# Altium PCB eBox_3G_SIM5320.PcbDoc
Units mm, origin at the board's own origin, x right, y up, seen from the top; angles counter-clockwise.
Board outline 46 x 42 mm, 2 copper layers (Top Layer, Bottom Layer), stack 1.271 mm thick; 63 components, 41 nets, 236 pads, 97 vias.
Unrouted connection lines stored in the file: 1.
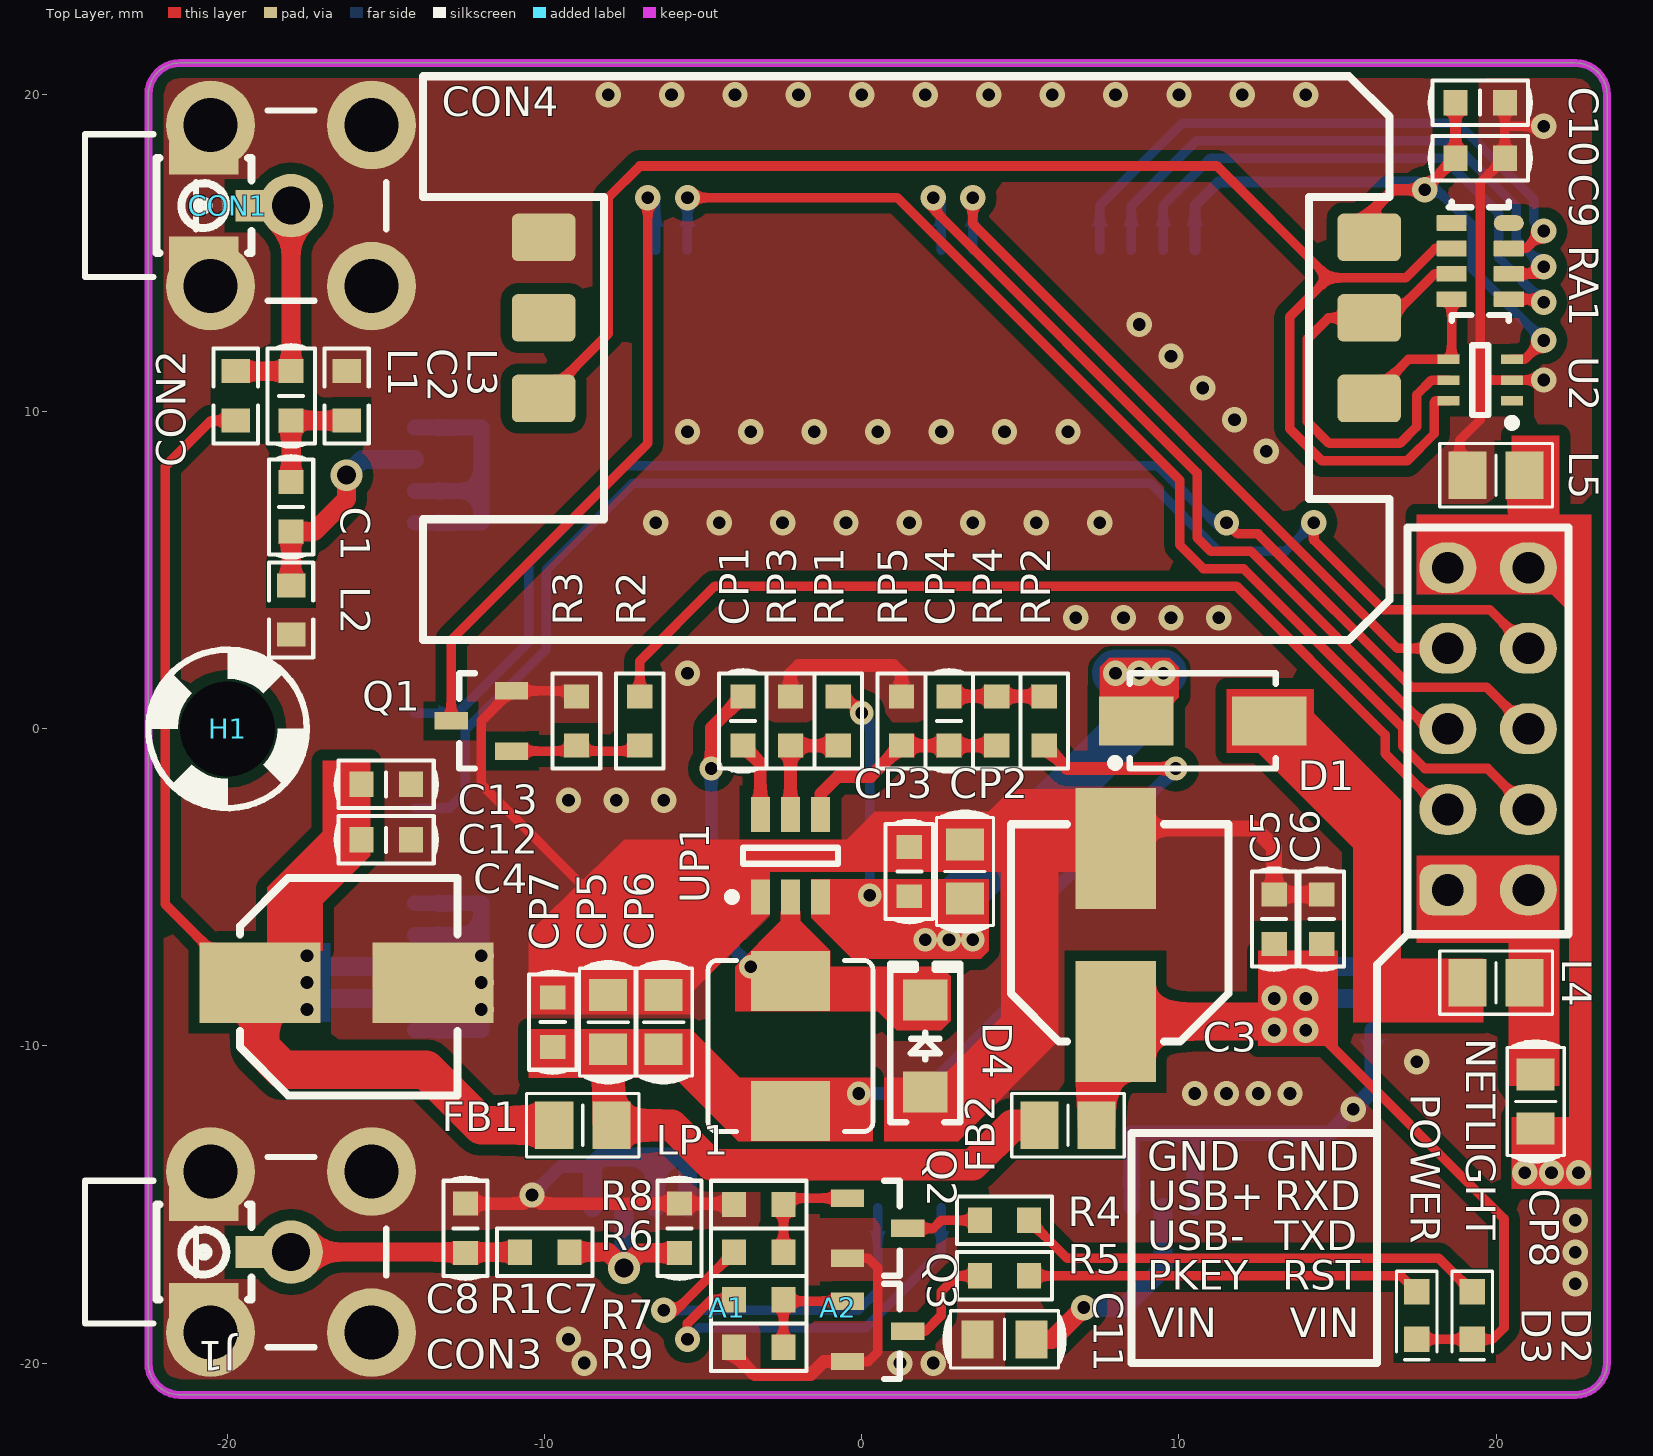
[diagram p0: Top Layer view]
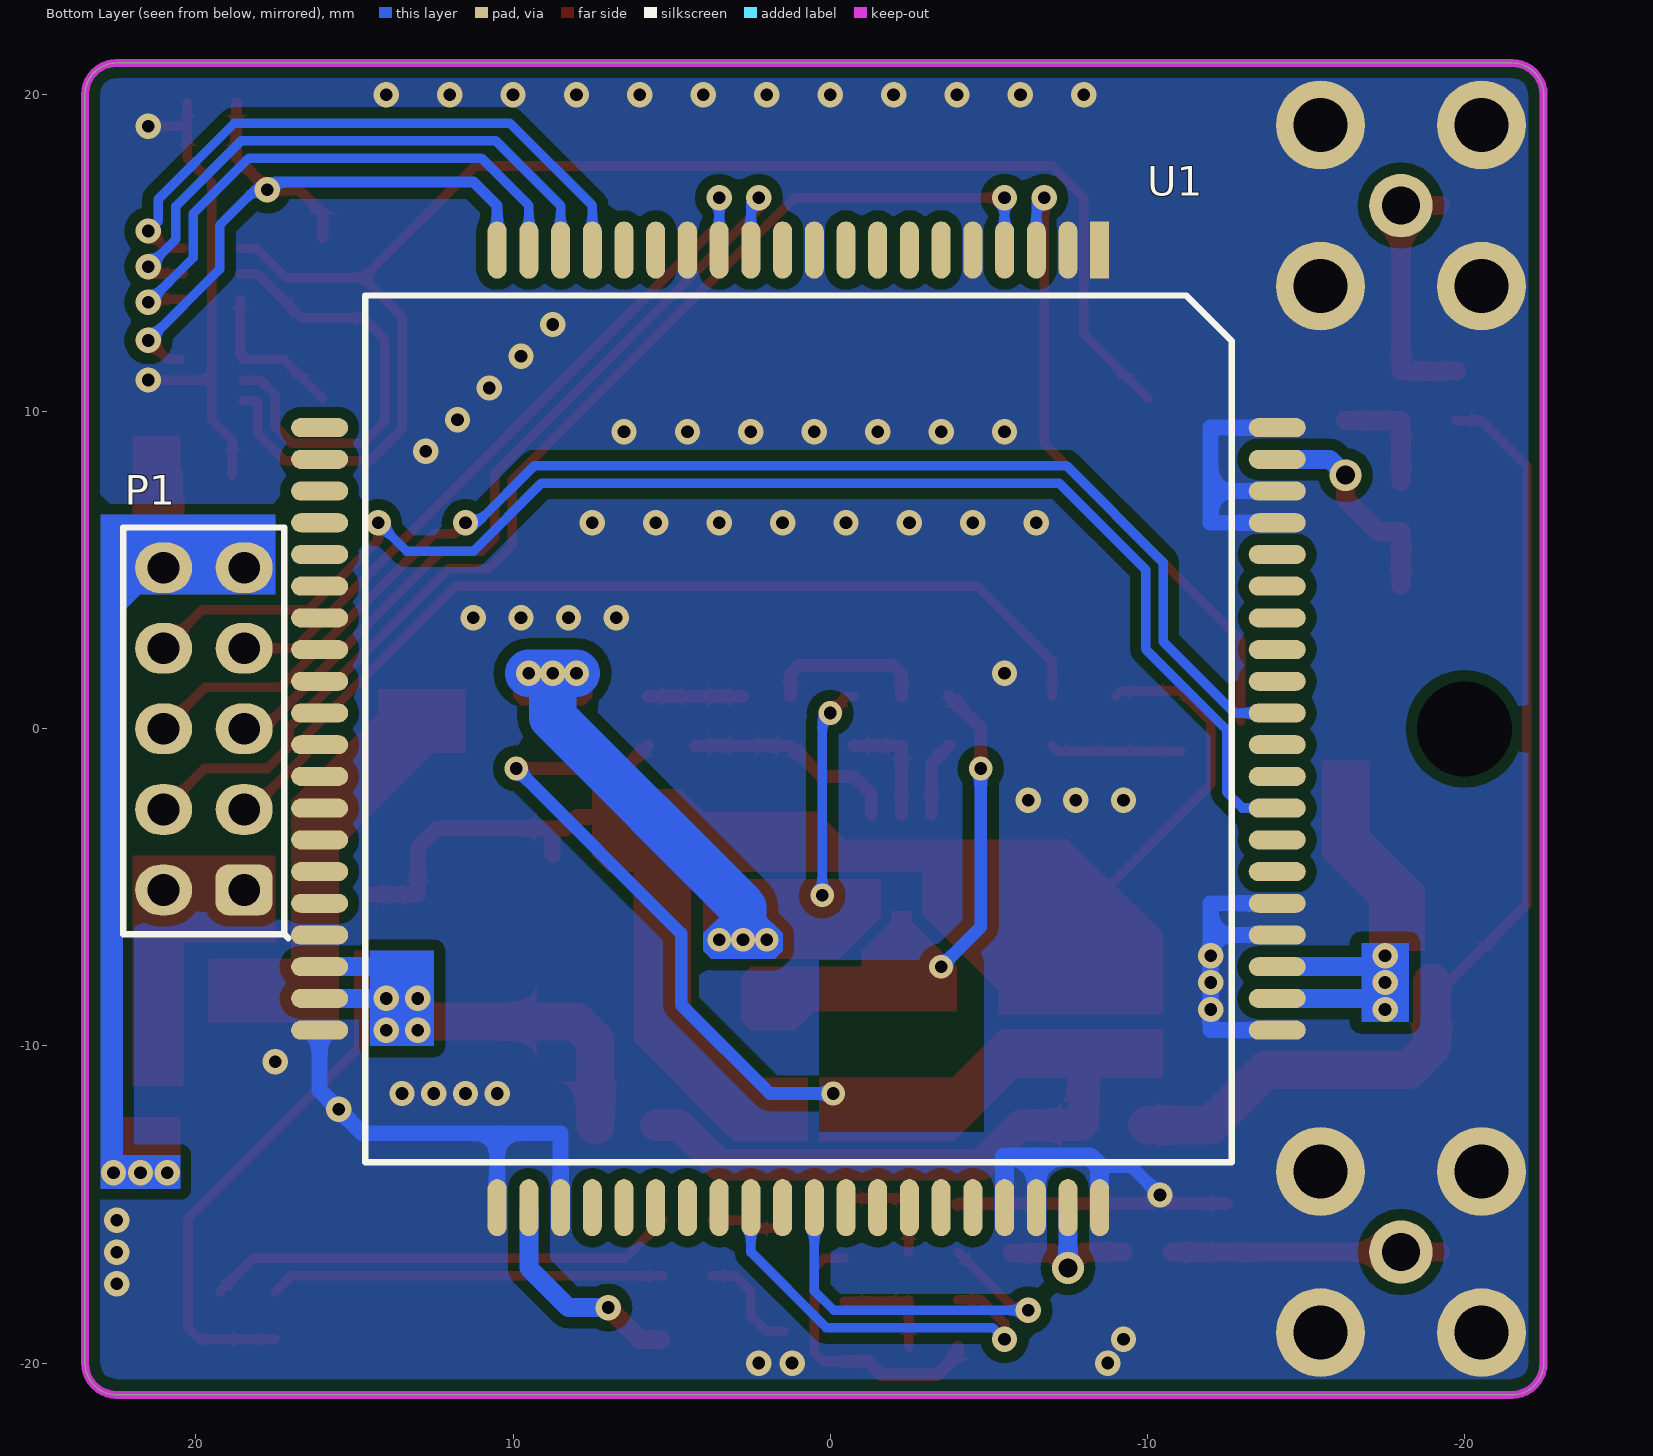
[diagram p1: Bottom Layer view, seen from below]

## Layer stack, top to bottom
Top Solder: solder mask 0.0102, Solder Resist, Dk 3.5
Top Layer: signal copper 0.0356
Dielectric 1: dielectric 1.2, FR-4, Dk 4.8
Bottom Layer: signal copper 0.0356
Bottom Solder: solder mask 0.0102, Solder Resist, Dk 3.5

## Board outline
-22.5,-20 ccw(c-21.5,-20) -21.5,-21 22.5,-21 ccw(c22.5,-20) 23.5,-20 23.5,20 ccw(c22.5,20) 22.5,21 -21.5,21 ccw(c-21.5,20) -22.5,20

## Design rules (kind name [scope] priority, off if disabled: settings)
Clearance Clearance_1 [InPolygon] p1: gap=0.35
Clearance [All] p2: gap=0.25
ComponentClearance ComponentClearance_1 [InComponent('F1') or InComponent('A1') or InComponent('A2') or InComponent('TX1')] p1: gap=0 collisioncheckmode=3 verticalgap=0 showdistances=FALSE
ComponentClearance [All] p2: gap=0.254 collisioncheckmode=3 verticalgap=0.254 showdistances=FALSE
PolygonConnect PolygonConnect_2 [InNet('GND')] p1: connectstyle=Direct reliefconductorwidth=0.254 reliefentries=4 polygonreliefangle="90 Angle" airgapwidth=0.254
PolygonConnect PolygonConnect_1 [IsVia] p2: connectstyle=Direct reliefconductorwidth=0.254 reliefentries=4 polygonreliefangle="90 Angle" airgapwidth=0.254
PolygonConnect [All] p3: connectstyle=Relief reliefconductorwidth=0.381 reliefentries=4 polygonreliefangle="90 Angle" airgapwidth=0.635
RoutingVias [All] p1: holewidth=0.4 width=0.8 viastyle="Through Hole" minholewidth=0.3 minwidth=0.6 maxholewidth=5 maxwidth=10
SolderMaskExpansion [All] p1: expansion=0.102
Width [All] p1: maxlimit=50 minlimit=0.2 preferedwidth=0.25
29 further rules are at their usual default settings.

## Classes and differential pairs
component class eBox_3G_REG: CP1 CP2 CP3 CP4 CP5 CP6 CP7 CP8 D1 D4 FB1 FB2 H1 L4 L5 LP1 P1 RP1 RP2 RP3 RP4 RP5 UP1
component class eBox_3G_SIM: A1 A2 C1 C2 C3 C4 C5 C6 C7 C8 C9 C10 C11 C12 C13 CON1 CON2 CON3 CON4 D2 D3 J1 L1 L2 L3 Q1 Q2 Q3 R1 R2 R3 R4 R5 R6 R7 R8 R9 RA1 U1 U2

## Components (designator, comment, footprint, x,y, rotation, side; value= is the part's Value field where it differs from the comment)
A1 "GSM Antenna" Antenna -4.25,-18.25 r0 top
A2 "GPS Antenna" Antenna -0.75,-18.25 r0 top
C1 "33pF" "CC 0603" -18,7 r270 top
C2 "33pF" "CC 0603" -18,10.5 r270 top
C3 "220uF" "C SMD ALU (D8)" 8,-6.5 r90 top
C4 "220uF" "C SMD ALU (D8)" -16.25,-8 r0 top
C5 "33pF" "CC 0603" 13,-6 r270 top
C6 "10pF" "CC 0603" 14.5,-6 r270 top
C7 "N/A" "CC 0603" -5.75,-15.75 r270 top
C8 "N/A" "CC 0603" -12.5,-15.75 r270 top
C9 "33pF" "CC 0603" 19.5,18 r0 top
C10 "0.1uF" "CC 0603" 19.5,19.75 r0 top
C11 "10uF" "CC 0805" 4.5,-19.25 r0 top
C12 "33pF" "CC 0603" -15,-3.5 r180 top
C13 "10pF" "CC 0603" -15,-1.75 r180 top
CON1 "IPX" CONN/IPX/SMD -20.75,16.5 r0 top locked
CON2 "SMA" CONN/SMA/RA -18,16.5 r0 top locked
CON3 "SMA" CONN/SMA/RA -18,-16.5 r0 top locked
CON4 "SIM Holder" "CON SIM Holder C707" 16,15.5 r180 top locked
CP1 "0.1uF" "CC 0603" -3.75,0.25 r90 top
CP2 "10uF" "CC 0805" 3.25,-4.5 r90 top
CP3 "0.1uF" "CC 0603" 1.5,-4.5 r90 top
CP4 "75pF" "CC 0603" 2.75,0.25 r270 top
CP5 "22uF" "CC 0805" -8,-9.25 r90 top
CP6 "22uF" "CC 0805" -6.25,-9.25 r90 top
CP7 "0.1uF" "CC 0603" -9.75,-9.25 r90 top
CP8 "1uF" "CC 0805" 21.25,-11.75 r270 top
D1 "Diode" "DO-214AC (SMA) L" 10.75,0.25 r180 top
D2 "LED GREEN" "Led 0603 - green" 19.25,-18.5 r90 top
D3 "LED RED" "LED 0603 - RED" 17.5,-18.5 r90 top
D4 "VTVS58ASMF-HM3-08" "SMF DO-219AB" 2,-10 r90 top
FB1 "270 Ohms @ 100MHz" "L 0805 (2012)" -8.8,-12.5 r180 top
FB2 "270 Ohms @ 100MHz" "L 0805 (2012)" 6.5,-12.5 r0 top
H1 "Screw Hole" SCREW/2.8M/5M -20,0 r0 top
J1 "IPEX" CONN/IPX/SMD -20.75,-16.5 r0 top locked
L1 "BEAD" "LL 0603" -19.75,10.5 r270 top
L2 "N/A" "LL 0603" -18,3.75 r90 top
L3 "N/A" "LL 0603" -16.25,10.5 r270 top
L4 "FB" "L 0805 (2012)" 20,-8 r180 top
L5 "FB" "L 0805 (2012)" 20,8 r180 top
LP1 "10uH" IND_MWSA0518_525418 -2.25,-10 r270 top
P1 "Header 5X2" HDR/Header/10/DL 19.75,0 r90 bottom
Q1 "MMBT3904LT1G" SOT-23 -12,0.25 r180 top
Q2 "MMBT3904LT1G" SOT-23 0.5,-15.75 r0 top
Q3 "MMBT3904LT1G" SOT-23 0.5,-19 r0 top
R1 "0R" "RR 0603" -10,-16.5 r0 top
R2 "4.7k" "RR 0603" -7,0.25 r270 top
R3 "47k" "RR 0603" -9,0.25 r90 top
R4 "330R" "RR 0603" 4.5,-15.5 r0 top
R5 "330R" "RR 0603" 4.5,-17.25 r0 top
R6 "4.7k" "RR 0603" -3.25,-16.5 r0 top
R7 "4.7k" "RR 0603" -3.25,-18 r0 top
R8 "47k" "RR 0603" -3.25,-15 r180 top
R9 "47k" "RR 0603" -3.25,-19.5 r180 top
RA1 "22R" "RAx4 1206 (3216)" 19.5,14.75 r0 top
RP1 "510k" "RR 0603" -0.75,0.25 r90 top
RP2 "49.9R" "RR 0603" 5.75,0.25 r90 top
RP3 "NC/105k" "RR 0603" -2.25,0.25 r270 top
RP4 "100.0k" "RR 0603" 4.25,0.25 r270 top
RP5 "17.4K" "RR 0603" 1.25,0.25 r90 top
U1 "SIM5320A" SIM5320 1,0 r270 bottom locked
U2 "SMF05CT1G" SOT-363-6 19.5,11 r180 top
UP1 "TPS54302DDC" SOT-23-6 -2.25,-4 r90 top

## Footprints (in the part's own frame and the unit in brackets; to place one, negate y for a bottom-side part, rotate by r counter-clockwise, add the part's x,y. Pads: shape width x height; smd on the part's side, far side on the other; paste and mask are expansions set on the pad)
Antenna [mm]
"C SMD ALU (D8)" [mil] "SMD Aluminum Electrolytic Capacitor, size D8 (6.3 x 7.7 mm)"
  rect 150x100 smd: 1(-107.5,0) 2(107.5,0)
  silkscreen extent -132,-140 138,130, body extent -138,-135 138,125, height 303
"CC 0603" [mm] "Chip Capacitor, 2-Leads, Body 1.6x0.8mm, IPC Medium Density"
  rect 0.756x0.8 smd: 1(-0.778,0) 2(0.778,0)
  silkscreen extent -1.6,-0.7 1.6,0.7, body extent -0.8,-0.43 0.8,0.43, height 0.81
"CC 0805" [mm] "Chip Capacitor, 2-Leads, Body 2.0x1.3mm, IPC Medium Density"
  rect 1.006x1.2 smd: 1(-0.853,0) 2(0.853,0)
  silkscreen extent -1.9,-0.9 1.9,0.9, body extent -1,-0.64 1,0.61, height 0.6
"CON SIM Holder C707" [mm] "SIM Holder,  6 pins"
  rrect25% 2x1.5 smd: 1(0,0) 2(0,2.54) 3(0,5.08) 5(26.035,0) 6(26.035,2.54) 7(26.035,5.08)
  silkscreen extent -0.64,-5.08 29.84,12.7, body extent -0.4,-4.85 29.6,12.45, height 2.5
CONN/IPX/SMD [mm]
  rect 1x1 smd: 1(1.5,0)
  rect 2.2x1.05 smd: 2(0,1.5) 3(0,-1.5)
  silkscreen extent -1.5,-1.5 1.5,1.5, body extent -1.3,-1.5 1.55,1.5, height 1.25
CONN/SMA/RA [mm] "Connector; RF Coaxial, MCX, Thru-Hole; 5 Position; Right Angle"
  round 2 hole 1.2: 1(0,0)
  round 2.8 hole 1.7: 2(-2.54,-2.54) 3(2.54,-2.54) 4(2.54,2.54) 5(-2.54,2.54)
  silkscreen extent -6.5,-3 3,3, body extent -6.5,-3 3,3, height 5.9
"DO-214AC (SMA) L" [mm] "Molded Diode, 2-Leads, Body 4.3x2.7mm, IPC Medium Density"
  rect 2.35x1.55 smd: 1(-2.1,0) 2(2.1,0)
  silkscreen extent -2.3,-1.5 2.89,1.5, body extent -2.6,-1.3 2.6,1.3, height 2.4
HDR/Header/10/DL [mm]
  rrect50% 1.6x1.8 hole 1: 1(-5.08,-1.27)
  oval 1.6x1.8 hole 1: 2(-5.08,1.27) 3(-2.54,-1.27) 4(-2.54,1.27) 5(0,-1.27) 6(0,1.27) 7(2.54,-1.27) 8(2.54,1.27) 9(5.08,-1.27) 10(5.08,1.27)
  silkscreen extent -6.6,-2.67 6.35,2.54, body extent -6.35,-2.54 6.35,2.54, height 8.89
IND_MWSA0518_525418 [mm]
  rect 1.9x2.5 smd paste+0 mask+0: 1(-2.05,0) 2(2.05,0)
  Top Layer pour cut-out: -2.7,2.6 2.7,2.6 2.7,-2.6 -2.7,-2.6
  silkscreen extent -2.7,-2.6 2.7,2.6, body extent -2.7,-2.6 2.7,2.6, height 1.8
"L 0805 (2012)" [mm] "Chip Capacitor, 2-Leads, Body 2.0x1.3mm, IPC Medium Density"
  rect 1.2x1.5 smd: 1(-0.9,0) 2(0.9,0)
  silkscreen extent -1.78,-1 1.78,1, body extent -1,-0.6 1,0.6, height 0.95
"Led 0603 - green" [mm] "Led SMD 0603"
  rect 0.8x0.8 smd: 1(-0.75,0) 2(0.75,0)
  silkscreen extent -1.4,-0.64 1.4,0.63, body extent -0.81,-0.4 0.81,0.4, height 0.6
"LED 0603 - RED" [mm] "Led SMD 0603"
  rect 0.8x0.8 smd: 1(-0.75,0) 2(0.75,0)
  silkscreen extent -1.4,-0.64 1.4,0.64, body extent -0.81,-0.4 0.81,0.4, height 0.6
"LL 0603" [mm] "Chip Capacitor, 2-Leads, Body 1.6x0.8mm, IPC Medium Density"
  rect 0.756x0.9 smd: 1(-0.778,0) 2(0.778,0)
  silkscreen extent -1.5,-0.7 1.5,0.7, body extent -0.8,-0.48 0.8,0.47, height 0.8
"RAx4 1206 (3216)" [mm] "Resistor Array x4 1206 (4D03)"
  rrect10% 0.95x0.5 smd: 1(-0.9,1.2) 2(-0.9,0.4) 3(-0.9,-0.4) 4(-0.9,-1.2) 5(0.9,-1.2) 6(0.9,-0.4) 7(0.9,0.4)
  oval 0.95x0.5 smd: 8(0.9,1.2)
  silkscreen extent -0.99,-1.88 0.9,1.88, body extent -0.8,-1.6 0.8,1.6, height 0.5
"RR 0603" [mm] "Chip Resistor, 2-Leads, Body 1.6x0.8mm, IPC Medium Density"
  rect 0.756x0.8 smd: 1(-0.778,0) 2(0.778,0)
  silkscreen extent -1.5,-0.75 1.5,0.75, body extent -0.8,-0.4 0.8,0.4, height 0.5
SCREW/2.8M/5M [mm]
  round 0 hole 3 unplated: 1(0,0)
  silkscreen extent -2.5,-2.5 2.5,2.5
SIM5320 [mm]
  rect 1.8x0.6 smd: 1(-15.1,9.5)
  oval 1.8x0.6 smd: 2(-15.1,8.5) 3(-15.1,7.5) 4(-15.1,6.5) 5(-15.1,5.5) 6(-15.1,4.5) 7(-15.1,3.5) 8(-15.1,2.5) 9(-15.1,1.5) 10(-15.1,0.5) 11(-15.1,-0.5) 12(-15.1,-1.5) 13(-15.1,-2.5) 14(-15.1,-3.5) 15(-15.1,-4.5) 16(-15.1,-5.5) 17(-15.1,-6.5) 18(-15.1,-7.5) 19(-15.1,-8.5) 20(-15.1,-9.5) 41(15.1,-9.5) 42(15.1,-8.5) 43(15.1,-7.5) 44(15.1,-6.5) 45(15.1,-5.5) 46(15.1,-4.5) 47(15.1,-3.5) 48(15.1,-2.5) 49(15.1,-1.5) 50(15.1,-0.5) 51(15.1,0.5) 52(15.1,1.5) 53(15.1,2.5) 54(15.1,3.5) 55(15.1,4.5) 56(15.1,5.5) 57(15.1,6.5) 58(15.1,7.5) 59(15.1,8.5) 60(15.1,9.5)
  oval 0.6x1.8 smd: 21(-9.5,-15.1) 22(-8.5,-15.1) 23(-7.5,-15.1) 24(-6.5,-15.1) 25(-5.5,-15.1) 26(-4.5,-15.1) 27(-3.5,-15.1) 28(-2.5,-15.1) 29(-1.5,-15.1) 30(-0.5,-15.1) 31(0.5,-15.1) 32(1.5,-15.1) 33(2.5,-15.1) 34(3.5,-15.1) 35(4.5,-15.1) 36(5.5,-15.1) 37(6.5,-15.1) 38(7.5,-15.1) 39(8.5,-15.1) 40(9.5,-15.1) 61(9.5,15.1) 62(8.5,15.1) 63(7.5,15.1) 64(6.5,15.1) 65(5.5,15.1) 66(4.5,15.1) 67(3.5,15.1) 68(2.5,15.1) 69(1.5,15.1) 70(0.5,15.1) 71(-0.5,15.1) 72(-1.5,15.1) 73(-2.5,15.1) 74(-3.5,15.1) 75(-4.5,15.1) 76(-5.5,15.1) 77(-6.5,15.1) 78(-7.5,15.1) 79(-8.5,15.1) 80(-9.5,15.1)
  silkscreen extent -13.66,-13.66 13.66,13.67, body extent -15,-15 15,15, height 2.9
"SMF DO-219AB" [mm] "Molded Diode, 2-Leads, Body 3.90x1.90mm, IPC Medium Density"
  rect 1.3x1.4 smd: 1(-1.45,0) 2(1.45,0)
  silkscreen extent -2.4,-1.1 2.59,1.1, body extent -1.5,-0.9 1.5,0.9, height 1.18
SOT-23 [mm] "SOT23, 3-Leads, Body 3.0x2.5mm (max), Pitch 0.95mm, IPC Medium Density"
  rect 1.05x0.55 smd: 1(-0.95,0.95) 2(-0.95,-0.95) 3(0.95,0)
  silkscreen extent 0.2,-1.5 0.7,1.5, body extent -1.28,-1.46 1.27,1.46, height 0.95
SOT-23-6 [mm] "SOT23, 6-Leads, Body 3.0x3.0mm (max), Pitch 0.95mm, IPC Medium Density"
  rect 1.1x0.6 smd: 1(-1.3,0.95) 2(-1.3,0) 3(-1.3,-0.95) 4(1.3,-0.95) 5(1.3,0) 6(1.3,0.95)
  silkscreen extent -1.42,-1.5 0.25,1.97, body extent -1.27,-1.4 1.16,1.4, height 1.09
SOT-363-6 [mm] "SOT363 (SC-88, SC-70-6), 6-Leads, Body 2.2x2.2mm (max), Pitch 0.65mm, IPC Medium Density"
  rect 0.7x0.3 smd: 1(-1,0.65) 2(-1,0) 3(-1,-0.65) 4(1,-0.65) 5(1,0) 6(1,0.65)
  silkscreen extent -1.13,-1.1 0.25,1.47, body extent -1.15,-1.05 1.15,1.05, height 1

## Part data
A1 A2: library part Antenna, "Antenna"
C1 C2 C5 C9 C12: library part "Capacitor NP", "CAP CER 33PF 100V C0G/NP0 0603"
C3 C4: library part Capacitor, "CAP TANT POLY 100UF 6.3V 1210"
C6 C13: library part "Capacitor NP", "CAP CER 10PF 100V C0G/NP0 0603"
C7 C8: library part "Capacitor NP", "CAP N/A"
C10 CP1 CP3 CP7: library part "Capacitor NP", "CAP CER 0.1UF 16V X7R 0603"
C11: library part "Capacitor NP", "CAP CER 10UF 10V X5R 0603"
CON1: library part "CON IPX"
CON2 CON3: library part "CON SMA", "SMA connectors"
CON4: library part "SIM holder 6 pin", "SIM Card holder, 6 pins"
CP2: library part "Capacitor NP", "CAP CER 10UF 25V X5R 0805"
CP4: library part "Capacitor NP", "CAP CER 75PF 50V C0G/NP0 0603"
CP5 CP6 CP8: library part "Capacitor NP", "CAP CER 22UF 25V X5R 0805"
D1: "Default Diode"
D2: library part Led, "LED GREEN DIFFUSED 0603 SMD"
D3: library part Led, "LED RED DIFFUSED 0603 SMD"
D4: "TVS DIODE 57.6V 98V DO219AB"
FB1 FB2: library part BLM21PG300SZ1D, "FERRITE BEAD 30 OHM 0805 1LN"
J1: library part "CON IPX", "CONN UMC RCPT STR 50 OHM SMD"
L1: library part Inductor, "FERRITE BEAD 30 OHM 0603 1LN"
L2 L3: library part Inductor, "IND N/A"
L4 L5: library part Inductor, "Inductor"
LP1: library part "Inductor Power", "Fixed Inductors 10uH 20% Low Profile"
P1: "Header, 5-Pin, Dual row"
Q1 Q2 Q3: "TRANS NPN 40V 0.2A SOT23"
R1: library part Resistors, "RES SMD 0 OHM JUMPER 1/10W 0603"
R2 R6 R7: library part Resistors, "RES SMD 4.7K OHM 1% 1/10W 0603"
R3 R8 R9: library part Resistors, "RES SMD 47K OHM 5% 1/10W 0603"
R4 R5: library part Resistors, "RES SMD 330 OHM 5% 1/10W 0603"
RA1: library part "Resistor Array x4"
RP1: library part Resistors, "RES SMD 510K OHM 1% 1/10W 0603"
RP2: library part Resistors, "RES SMD 49.9 OHM 1% 1/10W 0603"
RP3: library part Resistors, "RES SMD 105K OHM 1% 1/10W 0603"
RP4: library part Resistors, "RES SMD 100K OHM 1% 1/10W 0603"
RP5: library part Resistors, "RES SMD 17.4K OHM 1% 1/10W 0603"
U2: library part SMF05C, "TVS DIODE 5V 12.5V SC88"
UP1: library part TPS56339, "IC REG BUCK ADJ 3A TSOT23-6"

## Via types
v1: diameter 0.8, hole 0.4, Top Layer to Bottom Layer, tented both sides, 86 vias
v2: diameter 0.75, hole 0.4, Top Layer to Bottom Layer, tented both sides, 9 vias
v3: diameter 1, hole 0.6, Top Layer to Bottom Layer, tented both sides, 2 vias

## Nets (pads, with @x,y where several pads share a name; then routed paths per layer and width w, separated by ;. In a path a pad name is that pad's centre, name@x,y a point inside that pad or via, vN(x,y) a via of type N, cw(c..) or ccw(c..) an arc to the next point about the centre after c; other vN are vias at no path point)
GND: C3.2 C4.2 C5.1 C6.1 C7.1 C8.1 C9.2 C10.2 C11.1 C12.1 C13.1 CON1.2 CON1.3 CON2.2 CON2.3 CON2.4 CON2.5 CON3.2 CON3.3 CON3.4 CON3.5 CON4.5 CP2.2 CP3.2 CP5.2 CP6.2 CP7.2 D4.1 J1.2 J1.3 L2.1 L3.1 L5.2 Q1.2 Q2.2 Q3.2 R3.2 R8.2 R9.2 RP3.1 RP5.2 U1.1 U1.2 U1.5 U1.10 U1.14 U1.37 U1.40 U1.41 U1.43 U1.57 U1.58 U1.60 U1.61 U1.64 U1.65 U1.77 U1.78 U1.80 U2.2 UP1.1 | length 108.5
  Top Layer w0.3: R3.2 -9.172,1.2 Q1.2 -12,0.25 -12,-1.75 -8,-5.75 CP5.2 ; Q3.2 0.2,-19.95 0.5,-19.65 0.5,-17 0.2,-16.7 Q2.2 ; L5.2@18.85,8 18.85,9.1 19.5,9.75 19.5,10.75 ; C10.2 20.278,19.05 ; v1(21.5,11) U2.2 19.5,11 19.5,10.75 ; v1(21.5,19) 20.328,19 20.278,19.05 ; 19.5,10.75 19.5,17.222 C9.2 20.278,19.05
  Top Layer w0.4: C8.1 -10.672,-14.972 v1(-10.4,-14.7) -10.128,-14.972 C7.1 -4.056,-14.972 R8.2 ; R9.2 -4.028,-19.722 -3.382,-20.368 -1.618,-20.368 -1.2,-19.95 Q3.2 ; RP3.1 -2.25,1.75 -2,2 1,2 1.25,1.75 RP5.2
  Top Layer w0.5: 6.365,-3.14 6,-2.775 7.975,-2.775 8.34,-3.14 C3.2@8.75,-3.14 ; C3.2@8.75,-3.972 C3.2@8.75,-3.14 ; C6.1 C5.1 13,-3.75 12.39,-3.14 C3.2@8.75,-3.14
  Bottom Layer w0.4: v1(-10.4,-14.7) -9.5,-13.8 -8.5,-13.8
  Bottom Layer w0.5: U1.61 -12,-9.5 v1(-12,-8) -12,-6.5 ; U1.64 -12,-6.5 ; U1.65 -12,-5.5 -12,-6.5 ; U1.77 -12,6.5 -12,7.5 ; U1.78 -12,7.5 ; U1.80 -12,9.5 -12,7.5 ; U1.43 8.5,-13.566 8.5,-12.75 10.5,-12.75 ; U1.41 10.5,-12.75 ; U1.40 16.1,-11.4 14.75,-12.75 10.5,-12.75
  Bottom Layer w0.6: U1.60 -8.5,-13.8 -8.2,-13.5 -6.5,-13.5 ; U1.58 -6.5,-13.5 ; U1.57 -5.5,-13.5 -6.5,-13.5
  other v1: -8.75,-20 1.2,-20 2.25,-20 -9.25,-19.25 22.5,-17.5 22.5,-16.5 22.5,-15.5 15.5,-12 10.5,-11.5 11.5,-11.5 12.5,-11.5 13.5,-11.5 17.5,-10.5 -12,-8.85 -12,-7.15 -9.25,-2.25 -7.75,-2.25 -6.25,-2.25 -5.5,1.75 6.75,3.5 8.25,3.5 9.75,3.5 11.25,3.5 -6.5,6.5 -4.5,6.5 -2.5,6.5 -0.5,6.5 1.5,6.5 3.5,6.5 5.5,6.5 7.5,6.5 12.75,8.75 -5.5,9.369 -3.5,9.369 -1.5,9.369 0.5,9.369 2.5,9.369 4.5,9.369 6.5,9.369 11.75,9.75 10.75,10.75 9.75,11.75 8.75,12.75 -8,20 -6,20 -4,20 -2,20 0,20 2,20 4,20 6,20 8,20 10,20 12,20 14,20
GNDI: CP8.2 L5.1 P1.9 P1.10 | length 6
  Top Layer w1: P1.9 19.65,6.25 20.65,6.25 20.9,6 ; L5.1 20.9,6 ; P1.10 20.9,5.2 20.9,6
  other v1: 20.9,-14 21.75,-14 22.6,-14
GPS_ANT: C1.2 L2.2 U1.79 | length 7
  Top Layer w0.6: L2.2 C1.2 -17.278,6.222 -16.25,7.25 v3(-16.25,8)
  Bottom Layer w0.6: v3(-16.25,8) -15.75,8.5 U1.79
GSM_ATN: C7.2 R1.2 U1.59 | length 5.8
  Top Layer w0.6: R1.2 -8,-16.5 v3(-7.5,-17) -7.028,-16.528 C7.2
  Bottom Layer w0.6: v3(-7.5,-17) U1.59
NetC1_1: C1.1 C2.2 L3.2 | length 3.7
  Top Layer w0.6: C1.1 C2.2 L3.2
NetC2_1: C2.1 CON1.1 CON2.1 L1.1 | length 8.2
  Top Layer w0.6: L1.1 C2.1 CON2.1 CON1.1
NetC8_2: C8.2 CON3.1 J1.1 R1.1 | length 8.5
  Top Layer w0.6: J1.1 R1.1
NetC11_2: C11.2 U1.42 | length 7
  Top Layer w0.6: C11.2 6,-19.25 v1(7,-18.25)
  Bottom Layer w0.6: v1(7,-18.25) 8.25,-18.25 9.5,-17 U1.42
NetCON4_2: CON4.2 RA1.3 U2.5 | length 14.2
  Top Layer w0.3: U2.5 17.965,11 17.5,10.535 17.5,9.535 16.965,9 14.736,9 14.05,9.686 14.05,12.3 14.71,12.96 CON4.2 16.672,12.96 18.062,14.35 RA1.3
NetCON4_3: CON4.3 RA1.4 U2.4 | length 5
  Top Layer w0.3: CON4.3 17.23,11.65 U2.4 18.6,11.75 RA1.4
NetCON4_7: CON4.7 RA1.2 U2.6 | length 48.1
  Top Layer w0.3: CON4.7 -8,12.455 -8,16.75 -7,17.75 11.198,17.75 14.724,14.224 ; U2.6 18.092,10.35 18.05,10.308 18.05,9.308 17.192,8.45 14.508,8.45 13.5,9.458 13.5,13 14.724,14.224 ; RA1.2 18.084,15.15 17.158,14.224 14.724,14.224
NetCP1_1: CP1.1 UP1.6 | length 2.4
  Top Layer w0.4: CP1.1 -3.2,-1.078 UP1.6
NetCP1_2: CP1.2 D4.2 LP1.1 UP1.2 | length 9.5
  Top Layer w0.4: v2(-4.75,-1.25) -4.75,0.028 CP1.2
  Bottom Layer w0.4: v2(-4.75,-1.25) -4.75,-6.25 v2(-3.5,-7.5)
NetCP4_1: CP4.1 RP2.2 RP4.1 | length 3
  Top Layer w0.4: CP4.1 RP4.1 RP2.2
NetCP4_2: CP4.2 RP4.2 RP5.1 UP1.4 | length 6.8
  Top Layer w0.4: UP1.4 -1.3,-2.05 -0.75,-1.5 0.278,-1.5 RP5.1 CP4.2 RP4.2
NetCP5_1: CP5.1 CP6.1 CP7.1 FB1.1 FB2.1 LP1.2 RP2.1 | length 36.9
  Top Layer w0.4: RP2.1 6.472,-1.25 v2(9.9,-1.25)
  Top Layer w1: CP5.1 -8,-12.4 FB1.1 -6,-12.5 -4.75,-13.75 3.5,-13.75 4.75,-12.5 FB2.1@5.5,-12.5
  Bottom Layer w0.4: v2(-0.1,-11.5) 1.9,-11.5 4.7,-8.7 4.7,-6.45 v2(9.9,-1.25)
NetD1_1: D1.1 L4.2 | length 11.6
  Top Layer w1.5: D1.1 16.25,-3.15 16.25,-8 18.225,-8
NetD2_2: D2.2 R4.2 | length 14.9
  Top Layer w0.3: R4.2 6.478,-16.7 18.2,-16.7 D2.2
NetD3_2: D3.2 R5.2 | length 12.4
  Top Layer w0.3: R5.2 17,-17.25 D3.2
NetQ1_1: Q1.1 R2.2 R3.1 | length 4.1
  Top Layer w0.3: Q1.1 -7.172,-0.7 R2.2
NetQ2_1: Q2.1 R6.2 R8.1 | length 3.6
  Top Layer w0.3: R6.2 R8.1 -2.272,-14.8 Q2.1
NetQ2_3: Q2.3 R4.1 | length 2.4
  Top Layer w0.3: Q2.3 2.25,-15.75 2.5,-15.5 R4.1
NetQ3_1: Q3.1 R7.2 R9.1 | length 3.5
  Top Layer w0.3: R9.1 R7.2 -2.422,-18.05 Q3.1
NetQ3_3: Q3.3 R5.1 | length 3.4
  Top Layer w0.3: Q3.3 2,-19 2.5,-18.5 2.5,-17.75 3,-17.25 R5.1
NetRP1_1: RP1.1 RP3.2 UP1.5 | length 3.7
  Top Layer w0.4: UP1.5 RP3.2 RP1.1
NETSTAT: R6.1 U1.51 | length 12.6
  Top Layer w0.3: v1(-6.25,-18.334) -5.862,-18.334 R6.1
  Bottom Layer w0.3: v1(-6.25,-18.334) -0.112,-18.334 0.5,-17.722 U1.51
PWRKEY: Q1.3 U1.3 | length 20.8
  Top Layer w0.3: Q1.3 -12.95,2.8 -6.75,9 v1(-6.75,16.75)
  Bottom Layer w0.3: v1(-6.75,16.75) -6.5,16.5 U1.3
PWRSTAT: R7.1 U1.49 | length 12.8
  Top Layer w0.3: v1(-5.5,-19.25) -5.5,-18.75 -4.75,-18 R7.1
  Bottom Layer w0.3: v1(-5.5,-19.25) -5.134,-18.884 0.116,-18.884 2.5,-16.5 U1.49
SIM_PRESET: P1.4 U1.4 | length 37.7
  Top Layer w0.3: v1(-5.5,16.75) 1.119,16.75 10.023,7.845 10.023,5.799 10.772,5.05 12.041,5.05 17.05,0.041 17.05,-0.55 17.75,-1.25 19.73,-1.25 P1.4
  Bottom Layer w0.3: U1.4 v1(-5.5,16.75)
SIM_PWRKEY: P1.3 R2.1 | length 30.8
  Top Layer w0.3: R2.1 -7,2.139 -4.639,4.5 11.813,4.5 16.5,-0.187 16.5,-0.778 18.262,-2.54 P1.3
SIM_UART_RX: P1.8 U1.68 | length 45.2
  Top Layer w0.3: v1(14.25,6.5) 14.25,5.952 16.446,3.756 19.804,3.756 P1.8
  Bottom Layer w0.3: U1.68 -13,-2.5 -12.5,-2 -12.5,-0.028 -9.95,2.522 -9.95,5.022 -7.222,7.75 9.1,7.75 11.25,5.6 13.35,5.6 v1(14.25,6.5)
SIM_UART_TX: P1.6 U1.71 | length 43.3
  Top Layer w0.3: v1(11.5,6.5) 11.85,6.15 12.496,6.15 17.339,1.307 19.713,1.307 P1.6
  Bottom Layer w0.3: U1.71 -12.75,0.5 -10.5,2.75 -10.5,5.25 -7.45,8.3 9.328,8.3 11.128,6.5 v1(11.5,6.5)
SIM_USB_DM: P1.5 U1.12 | length 26.3
  Top Layer w0.3: v1(2.25,16.75) 2.25,16.396 10.573,8.073 10.573,6.027 11,5.6 12.269,5.6 17.869,0 P1.5
  Bottom Layer w0.3: v1(2.25,16.75) 2.5,16.5 U1.12
SIM_USB_DP: P1.7 U1.13 | length 23
  Top Layer w0.3: v1(3.5,16.75) 3.5,15.924 16.884,2.54 P1.7
  Bottom Layer w0.3: U1.13 v1(3.5,16.75)
USIM_CLK: RA1.5 U1.19 | length 17.9
  Top Layer w0.3: RA1.5 21.4,13.55 v1(21.5,13.45)
  Bottom Layer w0.3: U1.19 9.5,16.5 11,18 18.336,18 20.085,16.25 20.085,14.858 21.494,13.45 v1(21.5,13.45)
USIM_DATA: RA1.7 U1.17 | length 19.6
  Top Layer w0.3: RA1.7 20.944,15.15 21.494,15.7 v1(21.5,15.7)
  Bottom Layer w0.3: U1.17 7.5,16.5 10.1,19.1 18.791,19.1 21.185,16.706 21.185,16.015 v1(21.5,15.7)
USIM_RST: RA1.6 U1.18 | length 18.7
  Top Layer w0.3: RA1.6 21.275,14.35 v1(21.5,14.575)
  Bottom Layer w0.3: U1.18 8.5,16.5 10.55,18.55 18.564,18.55 20.635,16.478 20.635,15.433 21.494,14.575 v1(21.5,14.575)
V_SIM: C3.1 C4.1 C5.2 C6.2 C12.2 C13.2 D2.1 D3.1 FB1.2 FB2.2 L1.2 U1.38 U1.39 U1.62 U1.63 | length 68.7
  Top Layer w0.3: L1.2 -20.528,9.722 -21.973,8.277 -21.973,-5.527 -19.5,-8 C4.1 ; v1(14,-9.5) 14.3,-9.5 20.25,-15.45 20.25,-18.885 19.885,-19.25 D3.1
  Top Layer w1.2: C4.1 -18.981,-10.019 -18.25,-10.75 -13.75,-10.75 -12,-12.5 FB1.2@-10,-12.5 ; FB2.2 7.4,-9.831 C3.1 v1@12.75,-9.23
  Bottom Layer w0.6: v1(-17.5,-8.85) -17.15,-8.5 U1.62 ; v1(-17.5,-7.15) -17.15,-7.5 U1.63 ; v1(13,-8.5) 14,-7.5 U1.38 ; v1(14,-8.5) U1.39
  other v1: 13,-9.5 -17.5,-8
V_USIM: C9.1 C10.1 CON4.1 U1.20 U2.3 | length 22.8
  Top Layer w0.3: U2.3 20.9,11.65 v1(21.5,12.25)
  Top Layer w0.35: CON4.1 16,16.25 16.75,17 17.722,17 C9.1 C10.1
  Bottom Layer w0.3: v1(17.75,17) 18.137,17 19.25,15.888 19.25,14.5 v1(21.5,12.25)
  Bottom Layer w0.35: U1.20 10.5,16.5 11.25,17.25 17.5,17.25 v1(17.75,17)
VIN: CP8.1 L4.1 P1.1 P1.2
VIN1: CP2.1 CP3.1 D1.2 RP1.2 UP1.3 | length 18.3
  Top Layer w0.3: RP1.2 -0.528,1.028 v2(0,0.5)
  Bottom Layer w0.3: v2(0,0.5) 0.25,0.25 v2(0.25,-5.25)
  Bottom Layer w1.5: v2@2.75,-6.475 2.75,-5.635 8.75,0.365 8.75,1 ; v1(8,1.75) v1(9.5,1.75)
  other v1: 8.75,1.75
  other v2: 2,-6.65 2.75,-6.65 3.5,-6.65
pads on no net: CON4.6 H1.1 RA1.1 RA1.8 U1.6 U1.7 U1.8 U1.9 U1.11 U1.15 U1.16 U1.21 U1.22 U1.23 U1.24 U1.25 U1.26 U1.27 U1.28 U1.29 U1.30 U1.31 U1.32 U1.33 U1.34 U1.35 U1.36 U1.44 U1.45 U1.46 U1.47 U1.48 U1.50 U1.52 U1.53 U1.54 U1.55 U1.56 U1.66 U1.67 U1.69 U1.70 U1.72 U1.73 U1.74 U1.75 U1.76 U2.1

## Polygon pours and split planes (outlines as drawn)
GND on Bottom Layer "BOT" (solid, remove dead copper, pour order 8): -22.5,-21 23.5,-21 23.5,21 -22.5,21
GND on Top Layer "TOP" (solid, remove dead copper, pour order 10): -22.5,-21 23.5,-21 23.5,21 -22.5,21

## Keep-outs
Keep-Out Layer:
  the board outline again, w0.254

## Other copper
Top Layer:
  region net V_SIM: -18.75,-7 -17,-7 -17,-5.5 -15.5,-4 -15.5,-1 -17,-1 -17,-3.25 -18.75,-5
  region net GNDI: 17.5,6.75 17.5,4.25 21.75,4.25 22.3,3.7 22.3,-12.25 20.5,-12.25 20.5,-14.5 23,-14.5 23,6.75
  region net GND: 0.707,-13 3.038,-13 6.2,-9.838 6.2,-4.2 4.4,-4.2 4.4,-9.1 2.5,-11 0.707,-11
  region net NetCP1_2: 2.5,-9.5 1.1,-9.5 0.5,-8.9 -1.5,-8.9 -1.5,-7.5 2.5,-7.5 2.8,-7.8 2.8,-9.2
  region net NetD1_1: 19.6,-7.25 19.6,-9.25 15.5,-9.25 15.5,-3.75 12.5,-0.75 11.5,-0.75 11.5,1.25 14.25,1.25 14.25,0.5 17,-2.25 17,-7.25
  region net VIN: 20.4,-11.25 20.4,-6.75 17.5,-6.75 17.5,-4 22,-4 22,-11.25
  region net GNDI: 20.5,9.25 20.5,6.75 17.5,6.75 17.5,4.25 22,4.25 22,9.25
  region net V_SIM: 12.5,-7 15,-7 15,-10 12.5,-10
  region net NetCP1_2: -1.95,-5.75 -1.95,-6.05 -1,-7 -1,-8.9 -4,-8.9 -4,-7.5 -2.55,-6.05 -2.55,-5.75
  region net GND: -7.5,-3.5 -0.475,-3.5 0.413,-2.613 4,-2.613 4.713,-1.9 7.5,-1.9 7.5,-4 7,-4.5 -2.9,-4.5 -2.9,-5.85 -5.312,-8.263 -5.313,-9 -10.5,-9 -10.5,-6.432
  region net VIN1: -1.6,-5.95 -0.3,-7.25 3.75,-7.25 4,-7 4,-4.75 -1.6,-4.75
  region net NetCP5_1: 0.35,-11 -3.85,-11 -5.375,-9.475 -10.5,-9.475 -10.5,-11 -5.9,-11 -3.9,-13 0.35,-13
  region net VIN1: 10,1.95 9.7,2.25 7.8,2.25 7.5,1.95 7.5,1 7.75,0.75 9.75,0.75 10,1
Bottom Layer:
  rectangle net V_SIM: -18.25,-9.25 -16.75,-6.75
  pour cut-out: -4.85,-12.7 0.35,-12.7 0.35,-7.3 -4.85,-7.3
  region net GNDI: 17.5,6.75 17.5,4.25 21.75,4.25 22.3,3.7 22.3,-13.45 20.5,-13.45 20.5,-14.5 23,-14.5 23,6.75
  region net V_SIM: 12.5,-7 14.5,-7 14.5,-10 12.5,-10
  region net VIN1: 4,-6.45 3.3,-5.75 2.2,-5.75 1.5,-6.45 1.5,-7 1.75,-7.25 3.75,-7.25 4,-7
  region net VIN1: 10,1.95 9.7,2.25 7.8,2.25 7.5,1.95 7.5,1.4 7.75,1.15 9.75,1.15 10,1.4

## Silkscreen, mask and mechanical layers (free items; w line width, h text height)
Top Overlay:
  lines w0.254: 16.25,-12.75 16.25,-12.75 ; 16.25,-12.75 8.5,-12.75 8.5,-20 16.25,-20 16.25,-12.75 ; 16.25,-12.75 16.25,-7.437 17.21,-6.477 ; 17.21,-6.477 22.29,-6.477 22.29,6.35 17.21,6.35 17.21,-6.477
  text "NETLIGHT" at 18.75,-9.75 h1.6 r270
  text "POWER" at 17,-11.5 h1.6 r270
  text "GND" at 9,-14.25 h1.6
  text "GND" at 12.75,-14.25 h1.6
  text "USB+" at 9,-15.5 h1.6
  text "RXD" at 13,-15.5 h1.6
  text "USB-" at 9,-16.75 h1.6
  text "TXD" at 13,-16.75 h1.6
  text "PKEY" at 9,-18 h1.6
  text "RST" at 13.25,-18 h1.6
  text "VIN" at 9,-19.5 h1.6
  text "VIN" at 13.5,-19.5 h1.6
Mechanical 30:
  circle w0.127: c14.5,3.155 r0.405
  circle w0.127: c14.5,-7.005 r0.405
  lines w0.127: 13.865,-7.64 15.135,-7.64 15.135,3.79 13.865,3.79 13.865,-7.64
  lines w0.254: -18,-17 ccw(c-17,-17) -17,-18 17,-18 ccw(c17,-17) 18,-17 18,17 ccw(c17,17) 17,18 -17,18 ccw(c-17,17) -18,17 -18,-17